# EAGLE board 0a_cpu_mmu (EAGLE 6.6.0)
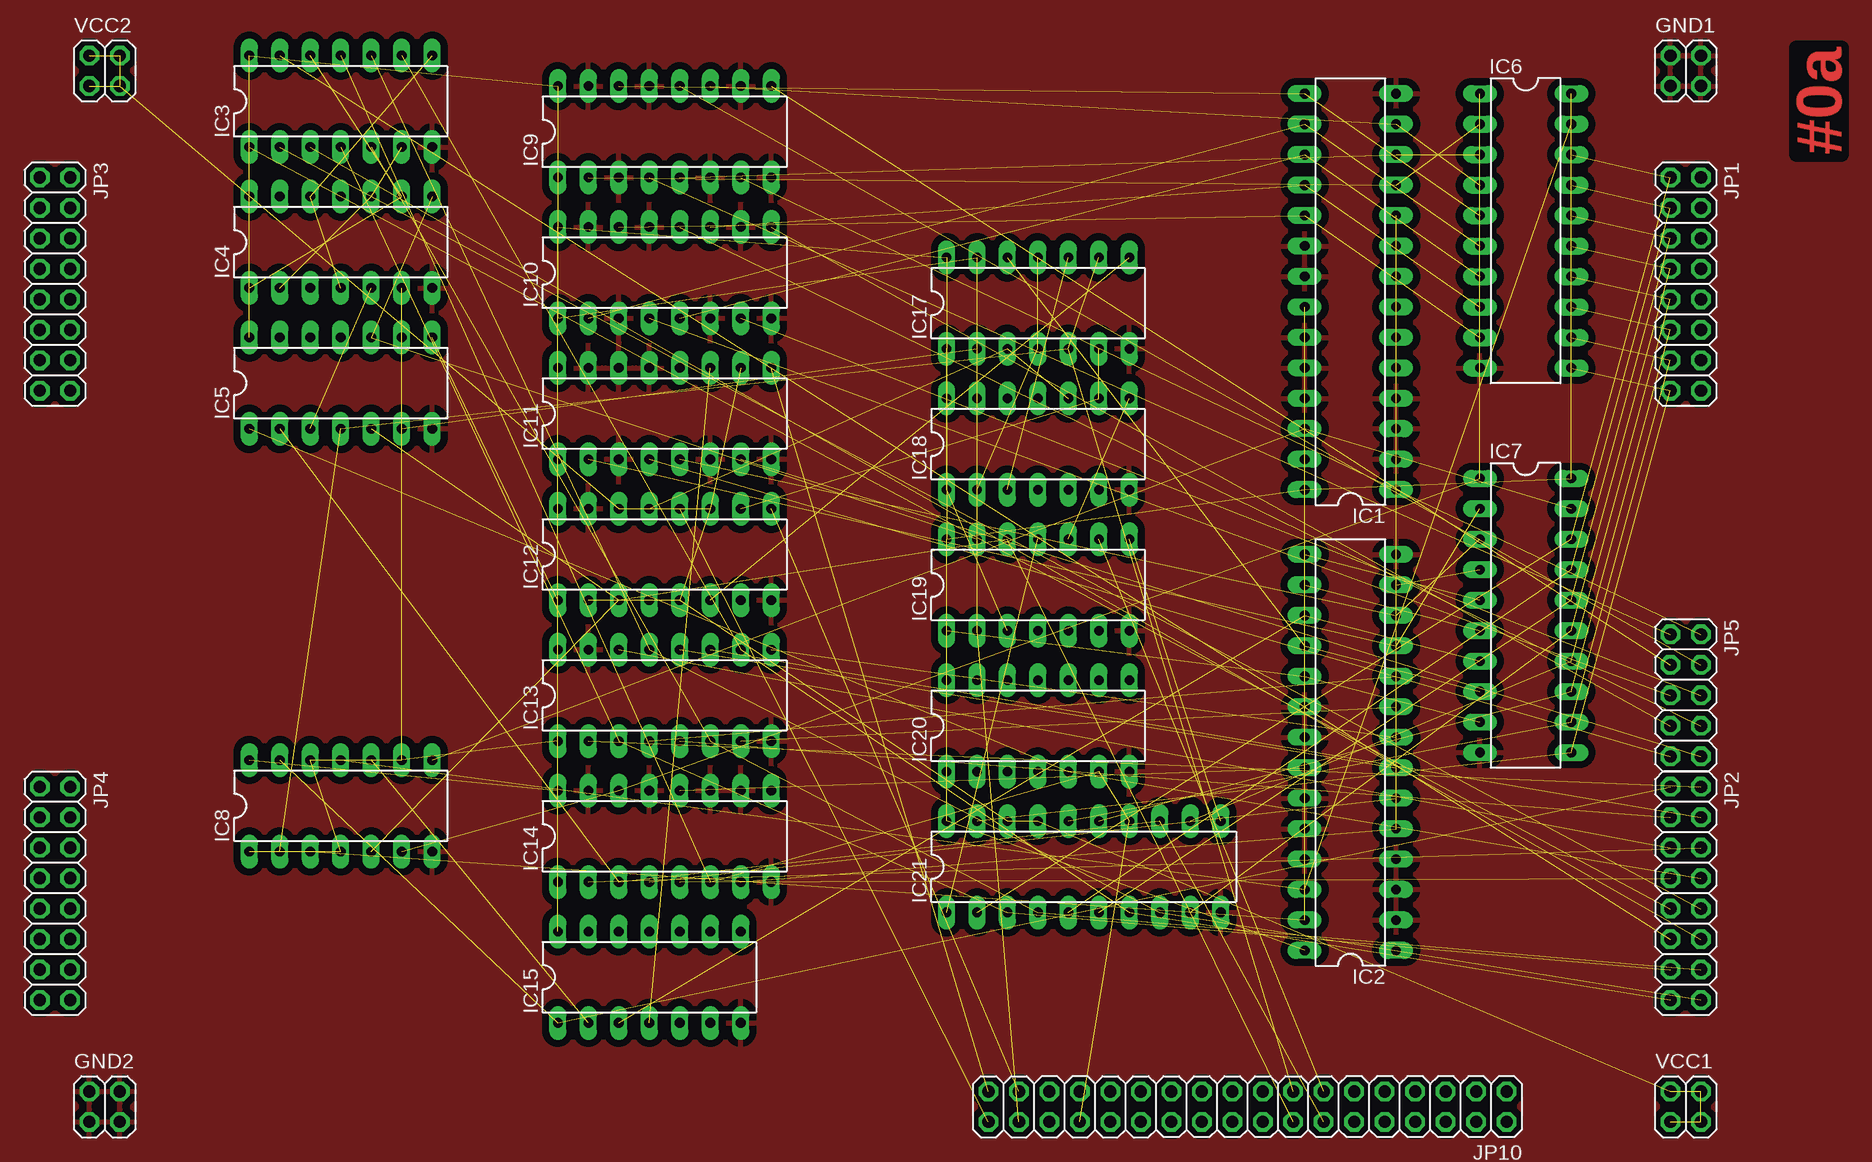
[diagram p0: board, top side]
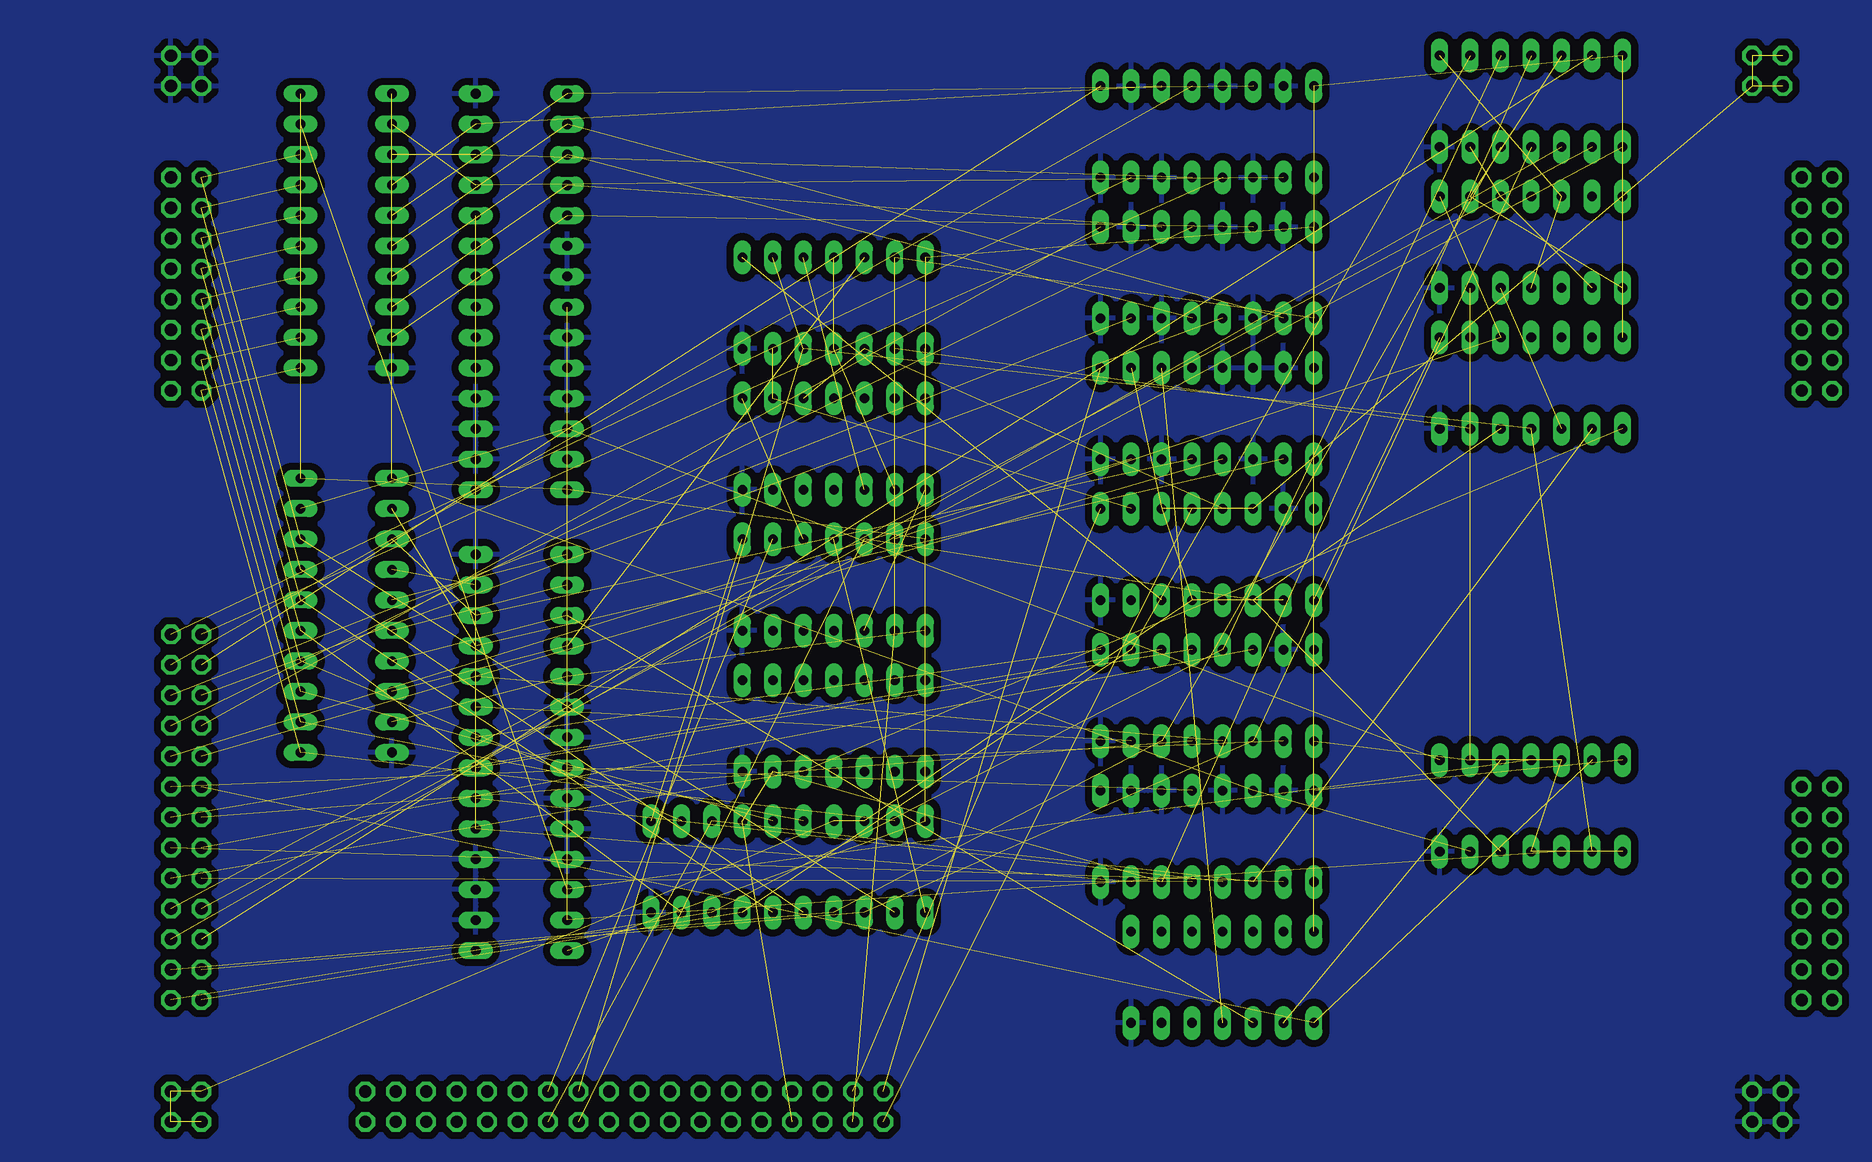
[diagram p1: board, bottom side, seen from below]

No outline drawn. Coordinates in mm, seen from the top.
Copper layers (1*16): Top 0.035mm / dielectric 1.5mm / Bottom 0.035mm
Design rules "homebrew_pcb": minimum track width 16mil, minimum drill 24mil, track to track 16mil, track to pad 10mil, pad to pad 10mil, via to via 10mil, smd to smd 8mil, copper to edge 30mil, drill to drill 10mil, minimum pad ring 12mil, minimum via ring 12mil, stop-mask expansion 4mil, vias tented up to drill 0mil, thermal gap 24mil

## Footprints (pad centres in the part's own frame; a part is rotated, then mirrored left to right if it is on the bottom)
2X02 = drill 1.016 octagon: 1 -1.27,-1.27; 2 -1.27,1.27; 3 1.27,-1.27; 4 1.27,1.27
DIL28-3 = drill 0.813 long: 1 -16.51,-3.81; 2 -13.97,-3.81; 3 -11.43,-3.81; 4 -8.89,-3.81; 5 -6.35,-3.81; 6 -3.81,-3.81; 7 -1.27,-3.81; 8 1.27,-3.81; 9 3.81,-3.81; 10 6.35,-3.81; 11 8.89,-3.81; 12 11.43,-3.81; 13 13.97,-3.81; 14 16.51,-3.81; 15 16.51,3.81; 16 13.97,3.81; 17 11.43,3.81; 18 8.89,3.81; 19 6.35,3.81; 20 3.81,3.81; 21 1.27,3.81; 22 -1.27,3.81; 23 -3.81,3.81; 24 -6.35,3.81; 25 -8.89,3.81; 26 -11.43,3.81; 27 -13.97,3.81; 28 -16.51,3.81
DIL14 = drill 0.813 long: 1 -7.62,-3.81; 2 -5.08,-3.81; 3 -2.54,-3.81; 4 0,-3.81; 5 2.54,-3.81; 6 5.08,-3.81; 7 7.62,-3.81; 8 7.62,3.81; 9 5.08,3.81; 10 2.54,3.81; 11 0,3.81; 12 -2.54,3.81; 13 -5.08,3.81; 14 -7.62,3.81
DIL20 = drill 0.813 long: 1 -11.43,-3.81; 2 -8.89,-3.81; 3 -6.35,-3.81; 4 -3.81,-3.81; 5 -1.27,-3.81; 6 1.27,-3.81; 7 3.81,-3.81; 8 6.35,-3.81; 9 8.89,-3.81; 10 11.43,-3.81; 11 11.43,3.81; 12 8.89,3.81; 13 6.35,3.81; 14 3.81,3.81; 15 1.27,3.81; 16 -1.27,3.81; 17 -3.81,3.81; 18 -6.35,3.81; 19 -8.89,3.81; 20 -11.43,3.81
DIL16 = drill 0.813 long: 1 -8.89,-3.81; 2 -6.35,-3.81; 3 -3.81,-3.81; 4 -1.27,-3.81; 5 1.27,-3.81; 6 3.81,-3.81; 7 6.35,-3.81; 8 8.89,-3.81; 9 8.89,3.81; 10 6.35,3.81; 11 3.81,3.81; 12 1.27,3.81; 13 -1.27,3.81; 14 -3.81,3.81; 15 -6.35,3.81; 16 -8.89,3.81
2X08 = drill 1.016 octagon: 1 -8.89,-1.27; 2 -8.89,1.27; 3 -6.35,-1.27; 4 -6.35,1.27; 5 -3.81,-1.27; 6 -3.81,1.27; 7 -1.27,-1.27; 8 -1.27,1.27; 9 1.27,-1.27; 10 1.27,1.27; 11 3.81,-1.27; 12 3.81,1.27; 13 6.35,-1.27; 14 6.35,1.27; 15 8.89,-1.27; 16 8.89,1.27
2X05 = drill 1.016 octagon: 1 -5.08,-1.27; 2 -5.08,1.27; 3 -2.54,-1.27; 4 -2.54,1.27; 5 0,-1.27; 6 0,1.27; 7 2.54,-1.27; 8 2.54,1.27; 9 5.08,-1.27; 10 5.08,1.27
2X18 = drill 1.016 octagon: 1 -21.59,-1.27; 2 -21.59,1.27; 3 -19.05,-1.27; 4 -19.05,1.27; 5 -16.51,-1.27; 6 -16.51,1.27; 7 -13.97,-1.27; 8 -13.97,1.27; 9 -11.43,-1.27; 10 -11.43,1.27; 11 -8.89,-1.27; 12 -8.89,1.27; 13 -6.35,-1.27; 14 -6.35,1.27; 15 -3.81,-1.27; 16 -3.81,1.27; 17 -1.27,-1.27; 18 -1.27,1.27; 19 1.27,-1.27; 20 1.27,1.27; 21 3.81,-1.27; 22 3.81,1.27; 23 6.35,-1.27; 24 6.35,1.27; 25 8.89,-1.27; 26 8.89,1.27; 27 11.43,-1.27; 28 11.43,1.27; 29 13.97,-1.27; 30 13.97,1.27; 31 16.51,-1.27; 32 16.51,1.27; 33 19.05,-1.27; 34 19.05,1.27; 35 21.59,-1.27; 36 21.59,1.27

## Placement (x,y rotation side)
GND1  [2X02]  141.92,93.34 0 top
GND2  [2X02]  10.16,6.99 0 top
IC1  MT5C6408  [DIL28-3]  113.98,74.93 90 top
IC2  MT5C6408  [DIL28-3]  113.98,36.51 90 top
IC3  74LS27N  [DIL14]  29.84,90.81 0 top
IC4  74LS20N  [DIL14]  29.84,79.06 0 top
IC5  74LS08N  [DIL14]  29.84,67.31 0 top
IC6  74LS245N  [DIL20]  128.59,80.01 270 top
IC7  74LS245N  [DIL20]  128.59,47.94 270 top
IC8  74LS32N  [DIL14]  29.84,32.07 0 top
IC9  74LS157N  [DIL16]  56.83,88.27 0 top
IC10  74LS157N  [DIL16]  56.83,76.52 0 top
IC11  74LS157N  [DIL16]  56.83,64.77 0 top
IC12  74LS157N  [DIL16]  56.83,53.02 0 top
IC13  74LS157N  [DIL16]  56.83,41.27 0 top
IC14  74LS157N  [DIL16]  56.83,29.53 0 top
IC15  74LS04N  [DIL14]  55.56,17.78 0 top
IC17  74LS32N  [DIL14]  87.95,73.98 0 top
IC18  74LS00N  [DIL14]  87.95,62.23 0 top
IC19  74LS32N  [DIL14]  87.95,50.48 0 top
IC20  74LS02N  [DIL14]  87.95,38.73 0 top
IC21  74LS374N  [DIL20]  91.76,26.99 0 top
JP1  [2X08]  141.92,75.56 270 top
JP2  [2X08]  141.92,24.77 270 top
JP3  [2X08]  6.03,75.56 270 top
JP4  [2X08]  6.03,24.77 270 top
JP5  [2X05]  141.92,41.27 270 top
JP10  [2X18]  105.41,6.99 180 top
VCC1  [2X02]  141.92,6.99 0 top
VCC2  [2X02]  10.16,93.34 0 top

## Library data of the parts
GND1 GND2 JP1-JP5 JP10 VCC1 VCC2 = pinhead
IC1 IC2 = dawid
IC3-IC15 IC17-IC21 = 74xx-eu

## Nets
+5V: IC11.10 IC12.2 IC12.5 IC12.11 IC12.14 IC21.17 IC21.18 VCC1.1 VCC1.2 VCC1.3 VCC1.4 VCC2.1 VCC2.2 VCC2.3 VCC2.4
/ALUHI2MEM: JP10.25
/ALULO2MEM: JP10.29
/BUSIFCEN: JP10.5
/CNTSP: JP10.3
/ENABUS: JP10.22
/ENMEM: IC5.5 IC8.5 IC12.3 IC19.12 JP10.16
/ENMEMX: IC12.4
/ENPTAB: IC6.1 IC7.1 IC8.6 IC14.14
/FI: JP10.32
/FP: IC9.1 IC10.1 IC11.1 IC17.13 IC19.2 JP10.34
/FS: IC3.11 IC14.6 IC20.6 IC21.14 JP10.30
/INCPC: JP10.1
/IO: IC11.9 JP10.35
/LATCHFLAGS: JP10.12
/LDMEM: IC5.4 IC8.2 IC17.5 IC17.9 JP10.15
/LDMEMX: IC12.7
/LDPTAB: IC1.27 IC2.27 IC8.3
/LOAD_IR: JP10.26
/MEM2ALUHI: JP10.27
/MEM2ALULO: JP10.31
/NP_FAULT: IC12.12 JP10.36
/PPREG: IC4.8 IC5.10 IC19.13
/PTAB: IC4.6 IC5.9 IC8.1 IC8.4 IC8.9 IC8.12 IC13.1 IC14.1
/RST: JP10.7
/WR_FAULT: IC12.9 JP10.33
ABUS0: IC8.13 IC15.1 JP2.1
ABUS1: IC13.2 JP2.2
ABUS2: IC13.5 JP2.3
ABUS3: IC13.11 JP2.4
ABUS4: IC13.14 JP2.5
ABUS5: IC14.2 JP2.6
ABUS6: IC14.5 JP2.7
ABUS7: IC5.1 IC20.5 JP2.8
ABUS8: IC3.1 JP2.9
ABUS9: IC3.2 JP2.10
ABUS10: IC3.13 JP2.11
ABUS11: IC3.3 JP2.12
ABUS12: IC3.4 IC13.3 IC21.3 JP2.13
ABUS13: IC3.5 IC13.6 IC21.4 JP2.14
ABUS14: IC3.9 IC13.10 IC21.7 JP2.15
ABUS15: IC3.10 IC13.13 IC21.8 JP2.16
ALUBUS0: JP3.1
ALUBUS1: JP3.2
ALUBUS2: JP3.3
ALUBUS3: JP3.4
ALUBUS4: JP3.5
ALUBUS5: JP3.6
ALUBUS6: JP3.7
ALUBUS7: JP3.8
ALUBUS8: JP3.9
ALUBUS9: JP3.10
ALUBUS10: JP3.11
ALUBUS11: JP3.12
ALUBUS12: JP3.13
ALUBUS13: JP3.14
ALUBUS14: JP3.15
ALUBUS15: JP3.16
BUSCLKA: JP10.23
BUSCLKB: JP10.24
CLK0A: IC19.9 JP10.13
CLK0B: JP10.18
CLK0C: JP10.19
CLK0D: JP10.17
CLK1: JP10.10
DBUS0: IC6.18 IC7.18 IC21.2 JP1.1
DBUS1: IC6.17 IC7.17 IC21.5 JP1.3
DBUS2: IC6.16 IC7.16 IC21.6 JP1.5
DBUS3: IC6.15 IC7.15 IC21.9 JP1.7
DBUS4: IC6.14 IC7.14 IC21.12 JP1.9
DBUS5: IC6.13 IC7.13 IC21.15 JP1.11
DBUS6: IC6.12 IC7.12 IC21.16 JP1.13
DBUS7: IC6.11 IC7.11 IC21.19 JP1.15
FAULT: JP10.28
FC: JP10.2
FIO: IC2.17 IC7.7 IC15.3
FN: JP10.6
FPRESENT: IC2.19 IC7.9 IC19.1
FV: JP10.8
FWRITABLE: IC2.18 IC7.8 IC17.12
FZ: JP10.4
GND: GND1.1 GND1.2 GND1.3 GND1.4 GND2.1 GND2.2 GND2.3 GND2.4 IC1.2 IC1.3 IC1.4 IC1.14 IC1.20 IC1.21 IC1.23 IC1.24 IC1.25 IC2.2 IC2.3 IC2.4 IC2.14 IC2.20 IC2.21 IC2.23 IC2.24 IC2.25 IC3.7 IC4.7 IC5.7 IC6.10 IC7.10 IC8.7 IC9.3 IC9.6 IC9.8 IC9.10 IC9.13 IC9.15 IC10.3 IC10.6 IC10.8 IC10.10 IC10.13 IC10.15 IC11.3 IC11.6 IC11.8 IC11.13 IC11.14 IC11.15 IC12.8 IC12.15 IC13.8 IC13.15 IC14.8 IC14.10 IC14.11 IC14.13 IC14.15 IC15.7 IC17.7 IC18.7 IC19.7 IC20.7 IC21.10
IRQ0: JP1.2
IRQ1: JP1.4
IRQ2: JP1.6
IRQ3: JP1.8
IRQ4: JP1.10
IRQ5: JP1.12
IRQ6: JP1.14
IRQ7: JP1.16
MEMSEG: IC5.2 IC14.3 IC21.13 JP10.14
N$1: IC3.12 IC4.1 IC4.9
N$2: IC3.6 IC4.2 IC4.10
N$4: IC4.5 IC5.3
N$5: IC1.11 IC6.2 IC9.2
N$6: IC1.12 IC6.3 IC9.5
N$7: IC1.13 IC6.4 IC9.11
N$8: IC1.15 IC6.5 IC9.14
N$9: IC1.16 IC6.6 IC10.2
N$10: IC1.17 IC6.7 IC10.5
N$11: IC1.18 IC6.8 IC10.11
N$12: IC1.19 IC6.9 IC10.14
N$13: IC2.11 IC7.2 IC11.2
N$14: IC2.12 IC7.3 IC11.5
N$15: IC2.13 IC7.4
N$16: IC2.15 IC7.5
N$17: IC2.16 IC7.6
N$18: IC11.11 IC15.4
N$19: IC5.6 IC17.2
N$20: IC12.6 IC17.8
N$21: IC1.10 IC2.10 IC13.4
N$22: IC1.9 IC2.9 IC13.7
N$23: IC1.8 IC2.8 IC13.9
N$24: IC1.7 IC2.7 IC13.12
N$25: IC1.6 IC2.6 IC14.4
N$26: IC1.5 IC2.5 IC14.7
N$27: IC1.26 IC7.19 IC8.8
N$28: IC2.26 IC6.19 IC8.11
N$29: IC1.22 IC2.22 IC14.12
N$30: IC8.10 IC15.2
N$31: IC12.10 IC17.6 IC18.9
N$32: IC12.13 IC17.3 IC18.10
N$33: IC17.10 IC18.3
N$34: IC17.4 IC17.11 IC18.2
N$35: IC17.1 IC18.1 IC19.3
N$37: IC3.8 IC4.4 IC4.12
N$39: IC5.8 IC12.1
N$40: IC18.8 IC19.10
N$41: IC19.8 IC21.11
N$42: IC19.11 IC21.1
PABUS12: IC9.4 JP5.1
PABUS13: IC9.7 JP5.2
PABUS14: IC9.9 JP5.3
PABUS15: IC9.12 JP5.4
PABUS16: IC10.4 JP5.5
PABUS17: IC10.7 JP5.6
PABUS18: IC10.9 JP5.7
PABUS19: IC10.12 JP5.8
PABUS20: IC11.4 JP5.9
PABUS21: IC11.7 JP5.10
PROT: JP10.21
RBUS0: JP4.1
RBUS1: JP4.2
RBUS2: JP4.3
RBUS3: JP4.4
RBUS4: JP4.5
RBUS5: JP4.6
RBUS6: JP4.7
RBUS7: JP4.8
RBUS8: JP4.9
RBUS9: JP4.10
RBUS10: JP4.11
RBUS11: JP4.12
RBUS12: JP4.13
RBUS13: JP4.14
RBUS14: JP4.15
RBUS15: JP4.16
RST: JP10.9
SP_DIR: JP10.20
VCC: IC1.28 IC2.28 IC3.14 IC4.14 IC5.14 IC6.20 IC7.20 IC8.14 IC9.16 IC10.16 IC11.16 IC12.16 IC13.16 IC14.16 IC15.14 IC17.14 IC18.14 IC19.14 IC20.14 IC21.20

## Tracks (layer width: path | path; a pad name or v marks a point on that pad's centre or on a via)
+5V  (14 unrouted)
/ENMEM  (4 unrouted)
/ENPTAB  (3 unrouted)
/FP  (5 unrouted)
/FS  (4 unrouted)
/IO  (1 unrouted)
/LDMEM  (4 unrouted)
/LDPTAB  (2 unrouted)
/NP_FAULT  (1 unrouted)
/PPREG  (2 unrouted)
/PTAB  (7 unrouted)
/WR_FAULT  (1 unrouted)
ABUS0  (2 unrouted)
ABUS1  (1 unrouted)
ABUS2  (1 unrouted)
ABUS3  (1 unrouted)
ABUS4  (1 unrouted)
ABUS5  (1 unrouted)
ABUS6  (1 unrouted)
ABUS7  (2 unrouted)
ABUS8  (1 unrouted)
ABUS9  (1 unrouted)
ABUS10  (1 unrouted)
ABUS11  (1 unrouted)
ABUS12  (3 unrouted)
ABUS13  (3 unrouted)
ABUS14  (3 unrouted)
ABUS15  (3 unrouted)
CLK0A  (1 unrouted)
DBUS0  (3 unrouted)
DBUS1  (3 unrouted)
DBUS2  (3 unrouted)
DBUS3  (3 unrouted)
DBUS4  (3 unrouted)
DBUS5  (3 unrouted)
DBUS6  (3 unrouted)
DBUS7  (3 unrouted)
FIO  (2 unrouted)
FPRESENT  (2 unrouted)
FWRITABLE  (2 unrouted)
GND
  pour Top (isolate 0.61): 0,100.01 160.02,100.01 160.02,0 0,0
  pour Bottom (isolate 0.61): 0,100.01 160.02,100.01 160.02,0 0,0
MEMSEG  (3 unrouted)
N$1  (2 unrouted)
N$2  (2 unrouted)
N$4  (1 unrouted)
N$5  (2 unrouted)
N$6  (2 unrouted)
N$7  (2 unrouted)
N$8  (2 unrouted)
N$9  (2 unrouted)
N$10  (2 unrouted)
N$11  (2 unrouted)
N$12  (2 unrouted)
N$13  (2 unrouted)
N$14  (2 unrouted)
N$15  (1 unrouted)
N$16  (1 unrouted)
N$17  (1 unrouted)
N$18  (1 unrouted)
N$19  (1 unrouted)
N$20  (1 unrouted)
N$21  (2 unrouted)
N$22  (2 unrouted)
N$23  (2 unrouted)
N$24  (2 unrouted)
N$25  (2 unrouted)
N$26  (2 unrouted)
N$27  (2 unrouted)
N$28  (2 unrouted)
N$29  (2 unrouted)
N$30  (1 unrouted)
N$31  (2 unrouted)
N$32  (2 unrouted)
N$33  (1 unrouted)
N$34  (2 unrouted)
N$35  (2 unrouted)
N$37  (2 unrouted)
N$39  (1 unrouted)
N$40  (1 unrouted)
N$41  (1 unrouted)
N$42  (1 unrouted)
PABUS12  (1 unrouted)
PABUS13  (1 unrouted)
PABUS14  (1 unrouted)
PABUS15  (1 unrouted)
PABUS16  (1 unrouted)
PABUS17  (1 unrouted)
PABUS18  (1 unrouted)
PABUS19  (1 unrouted)
PABUS20  (1 unrouted)
PABUS21  (1 unrouted)
VCC  (19 unrouted)

## Text on the board
Top: #0a